# Altium PCB PCB - OSSM Wireless v0.4.pcbdoc (part 1 of 2)
Units mm, origin at the board's own origin, x right, y up, seen from the top; angles counter-clockwise.
Board outline 142.7 x 72.7 mm, 4 copper layers (Top Layer, 3v3 - all domains, GND, Bottom Layer); 90 components, 64 nets, 371 pads, 137 vias.
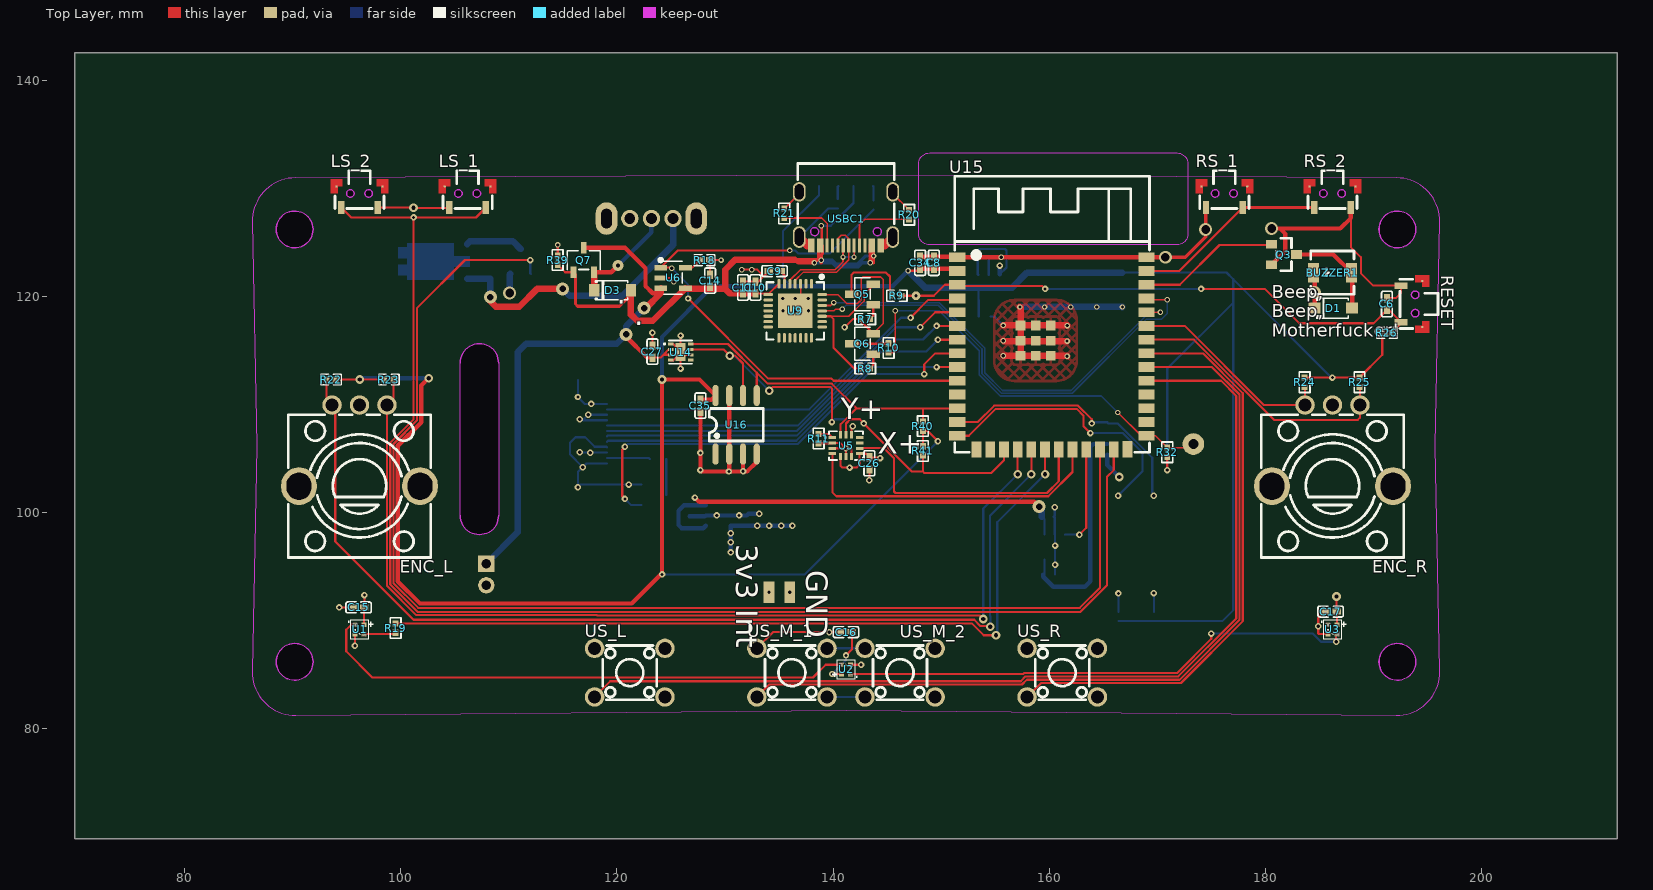
[diagram p0: Top Layer view]
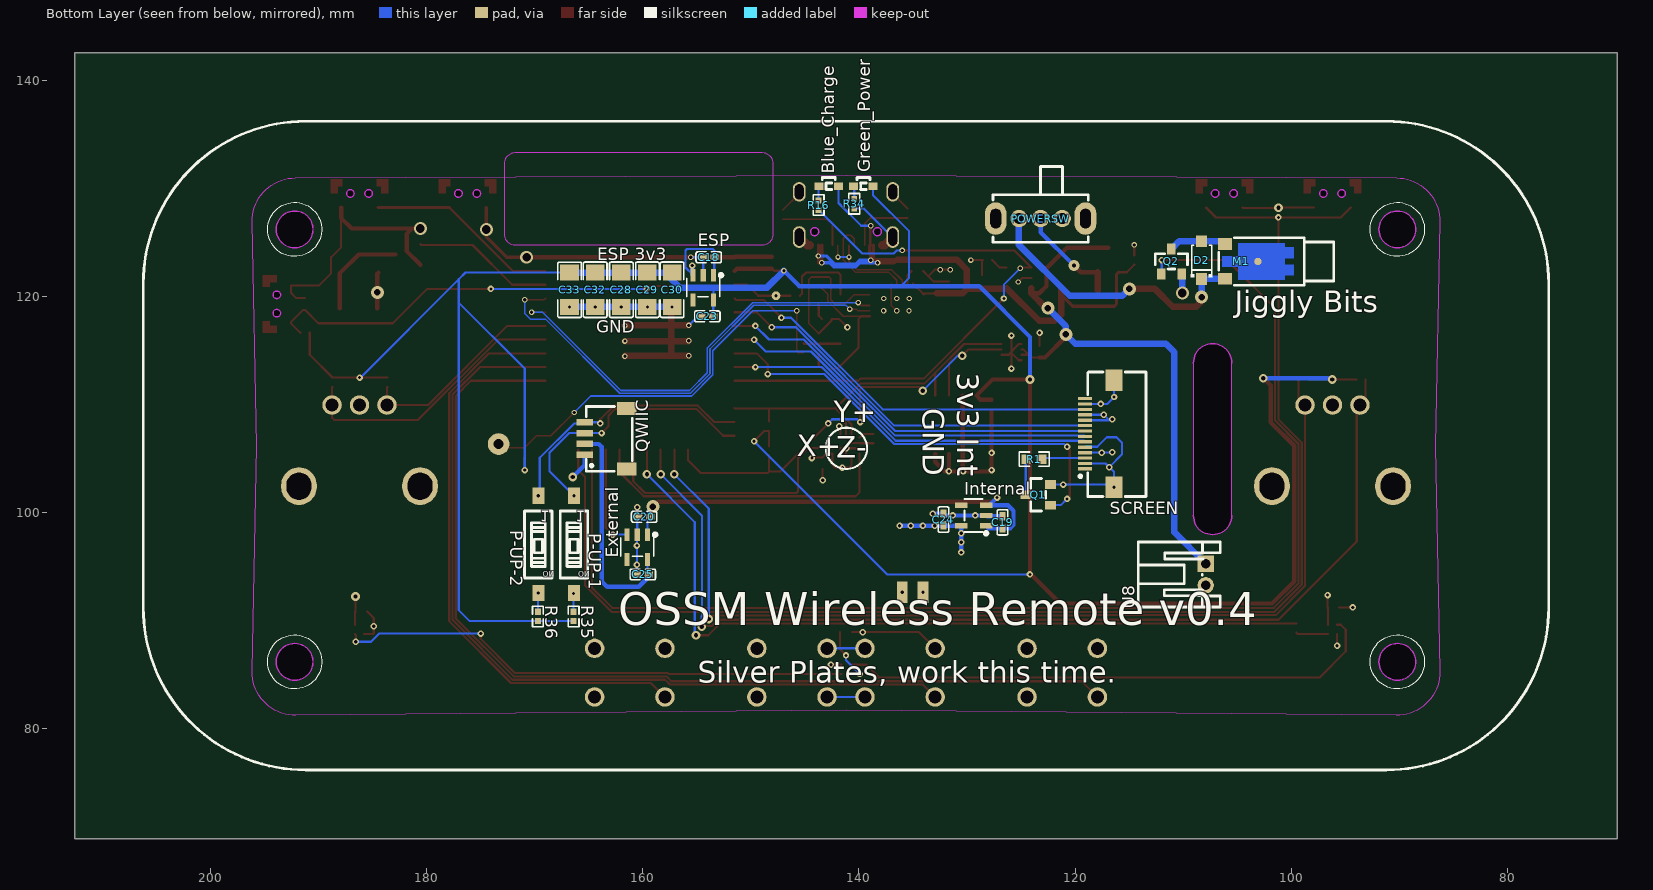
[diagram p1: Bottom Layer view, seen from below]
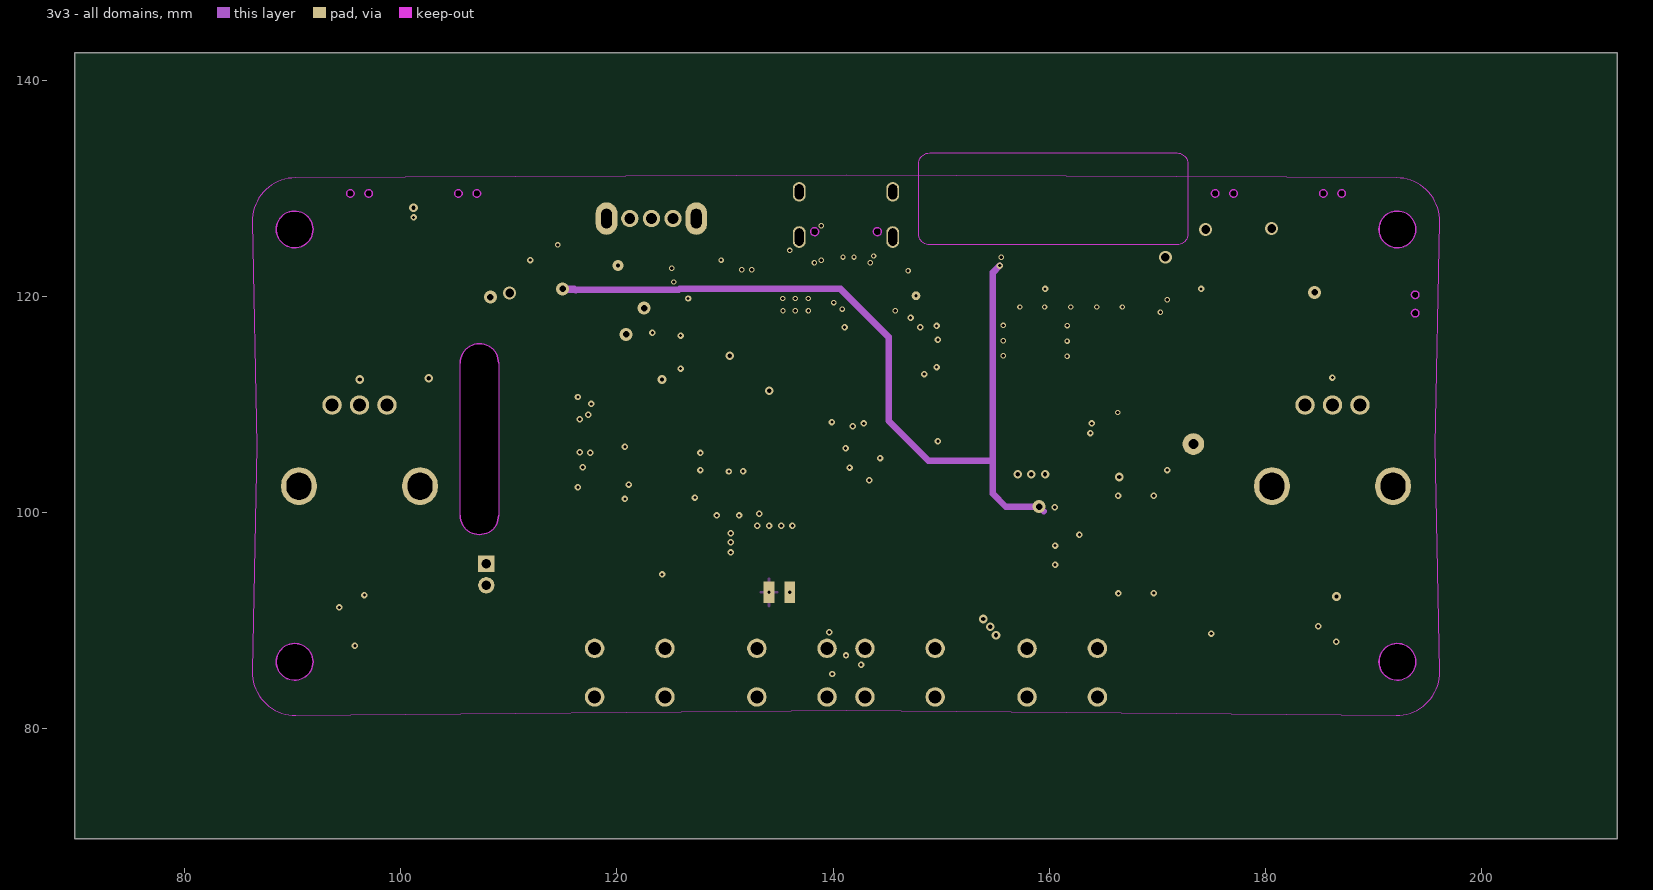
[diagram p2: 3v3 - all domains]
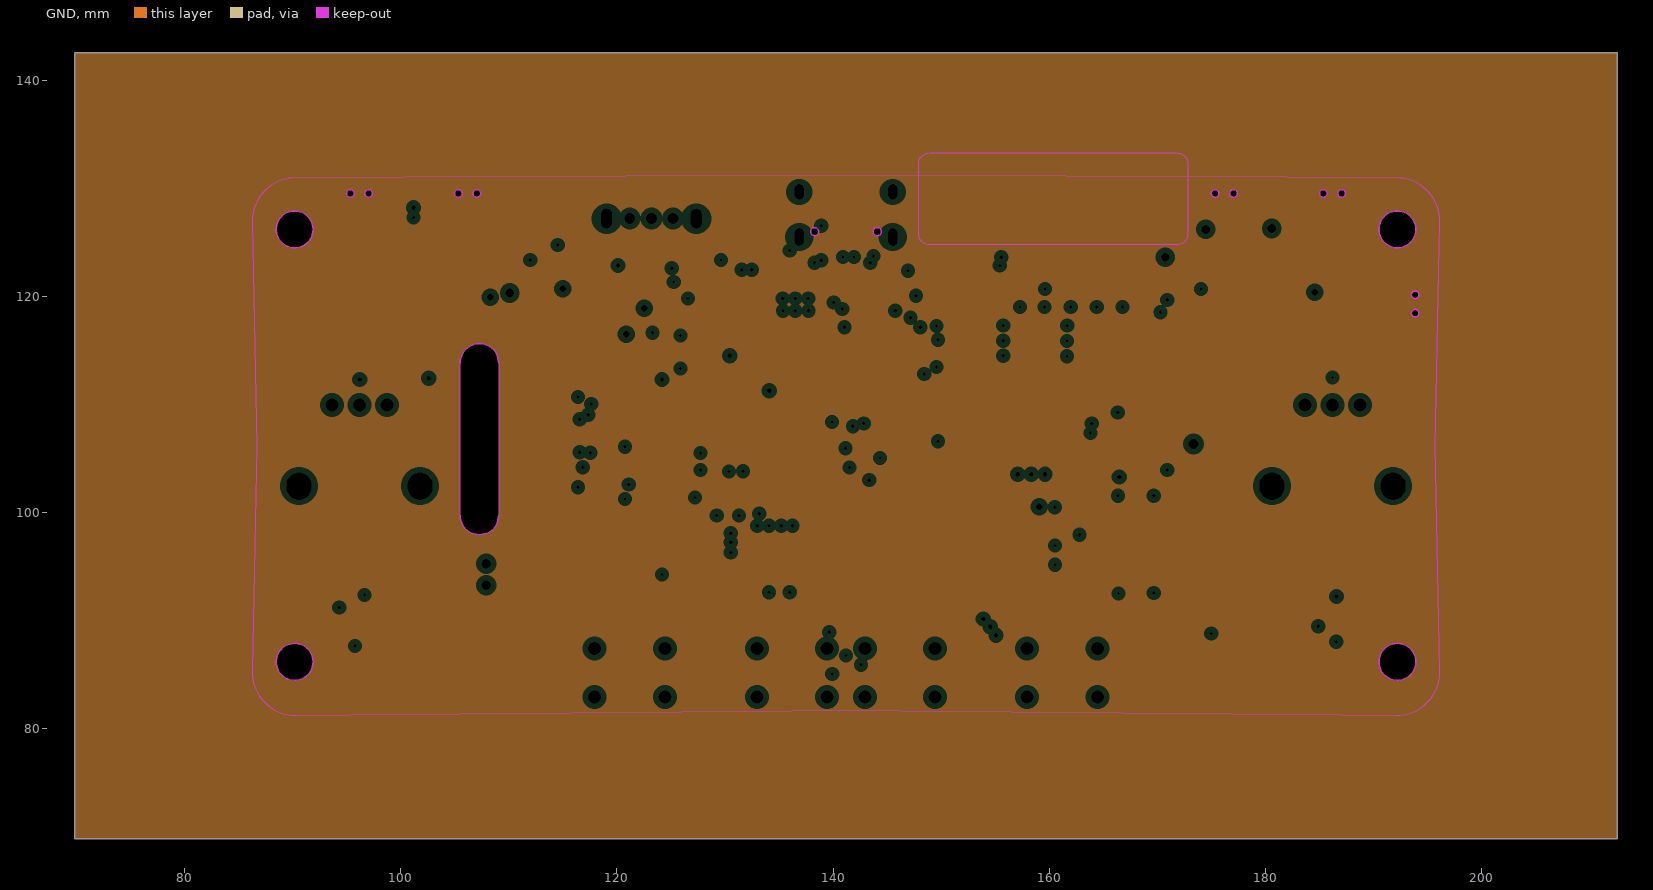
[diagram p3: GND, clearances drawn from the general rule]

## Layer stack, top to bottom
Top Layer: signal copper (thickness not stored)
Dielectric: dielectric 0.32, FR-4, Dk 4.8
3v3 - all domains: signal copper (thickness not stored)
Dielectric: dielectric 0.32, FR-4, Dk 4.8
GND: plane copper (thickness not stored)
Dielectric: dielectric 0.32, FR-4, Dk 4.8
Bottom Layer: signal copper (thickness not stored)

## Board outline
212.55,69.85 69.85,69.85 69.85,142.55 212.55,142.55
cut-out: 91.9,126.2 cw(c90.2,126.2) 88.5,126.2 cw(c90.2,126.2)
cut-out: 91.9,86.2 cw(c90.2,86.2) 88.5,86.2 cw(c90.2,86.2)
cut-out: 193.9,126.2 cw(c192.2,126.2) 190.5,126.2 cw(c192.2,126.2)
cut-out: 193.9,86.2 cw(c192.2,86.2) 190.5,86.2 cw(c192.2,86.2)
cut-out: 107.291,115.617 cw(c107.291,113.839) 109.069,113.839 109.069,99.742 cw(c107.291,99.742) 107.291,97.964 cw(c107.291,99.742) 105.513,99.742 105.513,113.839 cw(c107.291,113.839)

## Design rules (kind name [scope] priority, off if disabled: settings)
BoardOutlineClearance copperThickness1oz [All] p0: genericclearance=0.254 ignorepadtopadclearanceinfootprint=FALSE except(0: Arc-SplitContinuation Track-SplitContinuation SMDPad-SplitContinuation THPad-SplitContinuation Via-SplitContinuation Fill-SplitContinuation Poly-SplitContinuation Region-SplitContinuation Text-SplitContinuation; 0.152: Track-CutoutEdge SMDPad-CutoutEdge THPad-CutoutEdge Via-CutoutEdge Region-CutoutEdge; 0.3: Track-OutlineEdge SMDPad-OutlineEdge THPad-OutlineEdge Via-OutlineEdge Fill-OutlineEdge Region-OutlineEdge Poly-OutlineEdge Text-OutlineEdge Fill-CutoutEdge)
BoardOutlineClearance copperThickness2oz [All] p0: genericclearance=0.254 ignorepadtopadclearanceinfootprint=FALSE except(0: Arc-SplitContinuation Track-SplitContinuation SMDPad-SplitContinuation THPad-SplitContinuation Via-SplitContinuation Fill-SplitContinuation Poly-SplitContinuation Region-SplitContinuation Text-SplitContinuation; 0.152: Track-CutoutEdge SMDPad-CutoutEdge THPad-CutoutEdge Via-CutoutEdge Region-CutoutEdge; 0.3: Track-OutlineEdge SMDPad-OutlineEdge THPad-OutlineEdge Via-OutlineEdge Fill-OutlineEdge Region-OutlineEdge Poly-OutlineEdge Text-OutlineEdge Fill-CutoutEdge)
Clearance copperThickness1oz [(InNet('$1N4002') OR InNet('3V3_INTERNAL') OR InNet('3V3_ESP') OR InNet('3V3_EXTERNAL') OR InNet('GND') OR InNet('BTN_L_SHOULDER') OR InNet('$1N3724') OR InNet('BTN_R_SHOULDER') OR InNet('ESP_RXD') OR InNet('ESP_TXD') OR InNet('BTN_LEFT') OR InNet('$1N4079') OR InNet('BTN_CENTRE') OR InNet('$1N4135') OR InNet('BTN_RIGHT') OR InNet('S_CS') OR InNet('S_SCK') OR InNet('S_SDA') OR InNet('S_A0') OR InNet('S_RES') OR InNet('$1N3356') OR InNet('$1N4930') OR InNet('$1N3245') OR InNet('S_BACKLIGHT') OR InNet('VIBRATOR') OR InNet('BUZZER') OR InNet('$1N4926') OR InNet('CP_RTS') OR InNet('$1N4922') OR InNet('$1N4925') OR InNet('CP_DTR') OR InNet('$1N4921') OR InNet('ESP_EN') OR InNet('ESP_IO0') OR InNet('V_BAT_SWITCHED') OR InNet('$1N5610') OR InNet('GYRO_INT1') OR InNet('GYRO_INT2') OR InNet('SCL') OR InNet('SDA') OR InNet('V_BAT_IN') OR InNet('CHARGE_LED') OR InNet('ENC_L_A') OR InNet('ENC_L_B') OR InNet('ENC_R_A') OR InNet('ENC_R_B') OR InNet('$1N7211') OR InNet('$1N7163') OR InNet('$1N7169') OR InNet('V_USB') OR InNet('$1N6892') OR InNet('$1N7686') OR InNet('USB-') OR InNet('USB+') OR InNet('$1N7682') OR InNet('LED_PIXELS') OR InNet('EXT_1') OR InNet('EXT_2') OR InNet('$1N21887') OR InNet('3V3_EXTERNAL_CE') OR InNet('$1N42876') OR InNet('$1N42918') OR InNet('$1N54043') OR InNet('CHARGE_TO_MCU'))] p1: gap=0.178 ignorepadtopadclearanceinfootprint=FALSE except(0.102: Track-Track SMDPad-SMDPad; 0.152: Track-SMDPad Track-THPad SMDPad-THPad THPad-THPad Track-Via SMDPad-Via THPad-Via Via-Via SMDPad-Fill THPad-Fill Via-Fill Fill-Fill Track-Region SMDPad-Region THPad-Region Via-Region Region-Region Track-Poly SMDPad-Poly THPad-Poly Via-Poly Fill-Poly Region-Poly Poly-Poly Track-Text SMDPad-Text THPad-Text Via-Text Fill-Text Region-Text Poly-Text Text-Text; 0.175: Track-Hole SMDPad-Hole THPad-Hole Via-Hole Fill-Hole Region-Hole Poly-Hole Text-Hole Sheet-Hole; 0.3: Track-Fill Fill-Region Track-Sheet SMDPad-Sheet THPad-Sheet Via-Sheet Fill-Sheet Region-Sheet Poly-Sheet Text-Sheet)
Clearance copperThickness2oz [All] p1: gap=0.178 ignorepadtopadclearanceinfootprint=FALSE except(0.152: Track-SMDPad SMDPad-SMDPad Track-THPad SMDPad-THPad THPad-THPad Track-Via SMDPad-Via THPad-Via Via-Via SMDPad-Fill THPad-Fill Via-Fill Fill-Fill Track-Region SMDPad-Region THPad-Region Via-Region Region-Region Track-Poly SMDPad-Poly THPad-Poly Via-Poly Fill-Poly Region-Poly Poly-Poly Track-Text SMDPad-Text THPad-Text Via-Text Fill-Text Region-Text Poly-Text Text-Text; 0.175: Track-Hole SMDPad-Hole THPad-Hole Via-Hole Fill-Hole Region-Hole Poly-Hole Text-Hole Sheet-Hole; 0.203: Track-Track; 0.3: Track-Fill Fill-Region Track-Sheet SMDPad-Sheet THPad-Sheet Via-Sheet Fill-Sheet Region-Sheet Poly-Sheet Text-Sheet)
DiffPairsRouting differentialPair [All] p1: maxuncoupledlength=10 minlimit=5.9843 maxlimit=5.9843 mostfreqgap=5.9843 toplayer_minwidth=5 toplayer_prefwidth=10 toplayer_maxwidth=100 bottomlayer_minwidth=5 bottomlayer_prefwidth=10 bottomlayer_maxwidth=100 midlayer1_minwidth=5 midlayer1_prefwidth=10 midlayer1_maxwidth=100
PasteMaskExpansion pasteMaskExpansion [All] p1: expansion=0
PlaneConnect innerPlane [All] p1: planeconnectstyle=Relief reliefexpansion=0.508 reliefentries=4 reliefconductorwidth=0.254 reliefairgap=0.254
PolygonConnect copperRegion [All] p1: connectstyle=Relief reliefentries=4 reliefconductorwidth=10 polygonreliefangle="90 Angle" airgapwidth=10
RoutingVias viaSize [All] p1: viastyle="Through Hole" holewidth=12.0078 minholewidth=11.811 maxholewidth=248.0314 width=24.0158 minwidth=19.685 maxwidth=393.7008
SolderMaskExpansion solderMaskExpansion [All] p1: useseparateexpansions=TRUE expansion=2.0079 expansionbottom=2.0079
Width copperThickness1oz [All] p1: maxlimit=100 minlimit=4 preferedwidth=10
Width copperThickness2oz [All] p1: maxlimit=100 minlimit=8 preferedwidth=10

## Components (designator, comment, footprint, x,y, rotation, side; value= is the part's Value field where it differs from the comment)
Blue_Charge "TJ-S1706SW6TGLC6B-A5" LED-SMD_L1.7-W0.6-RD 142.8,130.2 r180 bottom
BUZZER1 "FUET-4020" BUZ-SMD_L4.0-W4.0-P3.50-L 186.2,122.2 r0 top locked
C6 "GRM155R61A106ME44D" C0402 191.238,119.3 r90 top
C8 "GRM155R61A106ME44D" C0402 149.328,123.11 r270 top
C9 "CL05A104KA5NNNC" C0402 134.596,122.348 r0 top
C10 "CL05A105KA5NQNC" C0402 132.818,120.824 r270 top
C11 "CL05A104KA5NNNC" C0402 131.675,120.824 r270 top
C14 "CL05A106MP5NUNC_C315248" C0402 128.627,121.459 r270 top
C15 "CL05A104KA5NNNC" C0402 96.115,91.233 r180 top
C16 "CL05A104KA5NNNC" C0402 141.2,88.947 r180 top
C17 "CL05A104KA5NNNC" C0402 186.031,90.852 r180 top
C18 "CL05A225KO5NQNC" C0402 153.9,123.618 r0 bottom
C19 "CL05A225KO5NQNC" C0402 126.722,99.107 r90 bottom
C20 "CL05A225KO5NQNC" C0402 159.869,99.615 r0 bottom
C23 "GRM155R61A106ME44D" C0402 154.027,118.157 r180 bottom
C24 "GRM155R61A106ME44D" C0402 132.183,99.361 r270 bottom
C25 "GRM155R61A106ME44D" C0402 159.996,94.281 r180 bottom
C26 "GRM155R61A106ME44D" C0402 143.359,104.568 r90 top
C27 "CL05A105KA5NQNC" C0402 123.298,114.892 r270 top
C28 "GRM31CR60J107ME39L" C1206 161.984,120.615 r90 bottom
C29 "GRM31CR60J107ME39L" C1206 159.571,120.615 r90 bottom
C30 "GRM31CR60J107ME39L" C1206 157.285,120.615 r90 bottom
C32 "GRM31CR60J107ME39L" C1206 164.397,120.615 r90 bottom
C33 "GRM31CR60J107ME39L" C1206 166.77,120.612 r90 bottom
C34 "CC0402KRX7R5BB103" C0402 148.058,123.11 r270 top
C35 "GRM155R61A106ME44D" C0402 127.738,109.902 r90 top
D1 "B5819W_C2943878" SOD-123F_L2.7-W1.6-LS3.8-RD-1 186.285,118.919 r0 top
D2 "B5819W_C2943878" SOD-123F_L2.7-W1.6-LS3.8-RD-1 108.307,123.364 r90 bottom
D3 "B5819W-TP" SOD-123_L2.8-W1.8-LS3.7-RD 119.61,120.57 r0 top
ENC_L "EC12E24204A7" SW-TH_EC12EXXXX 96.2,106.2 r180 top locked
ENC_R "EC12E24204A7" SW-TH_EC12EXXXX 186.2,106.2 r180 top locked
ESP "ME6211C33M5G-N" SOT-23-5_L3.0-W1.7-P0.95-LS2.8-BL 154.408,120.824 r0 bottom
External "ME6211C33M5G-N" SOT-23-5_L3.0-W1.7-P0.95-LS2.8-BL 160.504,96.821 r0 bottom
Green_Power "TJ-S1706SW6TGLC2G-A5" LED-SMD_L1.7-W0.6-RD 139.6,130.2 r180 bottom
Internal "ME6211C33M5G-N" SOT-23-5_L3.0-W1.7-P0.95-LS2.8-BL 129.389,99.742 r90 bottom
LS_1 "TS24CA" SW-SMD_TS24CA#1 106.2,129.2 r0 top locked
LS_2 "TS24CA" SW-SMD_TS24CA#1 96.2,129.2 r0 top locked
M1 "Z3OC1T8219731" VIBRATING-MOTOR-SMD_3P-C9900001680 104.624,123.237 r0 bottom
P-UP-1 "2.54-1P TPGT" SW-SMD_2P-L6.2-W2.5-LS9.4 166.365,97.059 r270 bottom
P-UP-2 "2.54-1P TPGT" SW-SMD_2P-L6.2-W2.5-LS9.4 169.659,97.059 r270 bottom
POWERSW "SK12D07VG5" SW-TH_SK12D07VG5 123.2,127.2 r0 bottom
Q1 "AO3400_C2938367" SOT-23_L2.9-W1.3-P1.90-LS2.4-BR 123.42,101.647 r180 bottom
Q2 "AO3400_C2938367" SOT-23_L2.9-W1.3-P1.90-LS2.4-BR 111.101,123.237 r270 bottom
Q3 "AO3400_C2938367" SOT-23_L2.9-W1.3-P1.90-LS2.4-BR 181.713,123.872 r180 top
Q5 "BC817" SOT-23-3_L2.9-W1.3-P1.90-LS2.4-BR 142.724,120.189 r0 top
Q6 "BC817" SOT-23-3_L2.9-W1.3-P1.90-LS2.4-BR 142.724,115.617 r0 top
Q7 "SI2301_C727151" SOT-23-3_L2.9-W1.4-P1.91-LS2.6-BR 116.943,123.364 r270 top
QWIIC "SM04B-SRSS-TB(LF)(SN)" CONN-SMD_4P-P1.00_SM04B-SRSS-TB-LF-SN 163.425,106.854 r90 bottom
R1 "PS03W4F100JT5E" R0603 123.801,104.949 r180 bottom
R7 "WR04X1002FTL" R0402 142.978,117.903 r0 top
R8 "WR04X1002FTL" R0402 142.978,113.331 r0 top
R9 "RC0402FR-07100RL" R0402 145.899,120.062 r0 top
R10 "RC0402FR-07100RL" R0402 145.137,115.236 r270 top
R11 "RC0402FR-071KL" R0402 138.66,106.854 r90 top
R16 "RC0402FR-071KL" R0402 143.74,128.444 r270 bottom
R18 "RC0402FR-072KL" R0402 128.119,123.364 r0 top
R19 "RC0402FR-07330RL" R0402 99.544,89.328 r270 top
R20 "0402WGF5101TCE" R0402 147.042,127.555 r90 top
R21 "0402WGF5101TCE" R0402 135.485,127.682 r90 top
R22 "RC0402FR-0710KL" R0402 93.575,112.315 r180 top
R23 "RC0402FR-0710KL" R0402 98.909,112.315 r0 top
R24 "RC0402FR-0710KL" R0402 183.618,112.061 r270 top
R25 "RC0402FR-0710KL" R0402 188.698,112.061 r270 top
R26 "WR04X1002FTL" R0402 191.238,116.633 r180 top
R32 "RC0402FR-0710KL" R0402 170.918,105.584 r270 top
R34 "RC0402FR-075K1L" R0402 140.438,128.571 r90 bottom
R35 "RC0402FR-0710KL" R0402 166.398,90.396 r270 bottom
R36 "RC0402FR-0710KL" R0402 169.7,90.396 r270 bottom
R39 "RC0402FR-0710KL" R0402 114.53,123.364 r90 top
R40 "0402WGJ0472TCE" R0402 148.312,107.997 r90 top
R41 "0402WGJ0472TCE" R0402 148.312,105.711 r270 top
RESET "TS24CA" SW-SMD_TS24CA#2 193.524,119.3 r270 top locked
RS_1 "TS24CA" SW-SMD_TS24CA#1 176.2,129.2 r0 top locked
RS_2 "TS24CA" SW-SMD_TS24CA#1 186.2,129.2 r0 top locked
SCREEN "AFC01-S14FCA-00" FPC-SMD_AFC01-S14FCA-00 117.742,107.3 r90 bottom
U1 "XL-1010RGBC-WS2812B" LED-SMD_4P-L1.0-W1.0-TL_XL-1010RGBC-WS2812B 96.2,89.2 r0 top locked
U2 "XL-1010RGBC-WS2812B" LED-SMD_4P-L1.0-W1.0-TL_XL-1010RGBC-WS2812B 141.2,85.5 r180 top locked
U3 "XL-1010RGBC-WS2812B" LED-SMD_4P-L1.0-W1.0-TL_XL-1010RGBC-WS2812B 186.2,89.2 r0 top locked
U5 "LSM6DS3TR-C" LGA-14_L3.0-W2.5-P0.50-TL 141.2,106.2 r0 top
U6 "TP4054-42-SOT25R" SOT-23-5_L3.0-W1.7-P0.95-LS2.8-BL 125.198,121.713 r270 top
U8 "S2B-PH-K(LF)(SN)" CONN-TH_S2B-PH-K-LF-SN 107.926,94.281 r90 bottom
U9 "CP2102-GMR" WQFN-28_L5.0-W5.0-P0.50-BL-EP3.2 136.501,118.665 r180 top
U14 "MAX17048G+T10" DFN-8_L2.0-W2.0-P0.50-BL-EP 125.9,114.853 r270 top
U15 "ESP32-S3-WROOM-1-N16R8" WIRELM-SMD_ESP32-S3-WROOM-1 160.25,114.728 r0 top locked
U16 "AT24C04C-SSHM-T" SOIC-8_L5.0-W4.0-P1.27-LS6.0-BL 131.04,108.124 r0 top
US_L "TC-6610-9-260G" SW-TH_4P-L5.0-W5.0-P4.50-LS6.5 121.2,85.2 r0 top locked
US_M_1 "TC-6610-9-260G" SW-TH_4P-L5.0-W5.0-P4.50-LS6.5 136.2,85.2 r0 top locked
US_M_2 "TC-6610-9-260G" SW-TH_4P-L5.0-W5.0-P4.50-LS6.5 146.2,85.2 r0 top locked
US_R "TC-6610-9-260G" SW-TH_4P-L5.0-W5.0-P4.50-LS6.5 161.2,85.2 r0 top locked
USBC1 "TYPE-C-31-M-12" USB-C_SMD-TYPE-C-31-M-12 141.2,127.2 r180 top locked

## Footprints (in the part's own frame and the unit in brackets; to place one, negate y for a bottom-side part, rotate by r counter-clockwise, add the part's x,y. Pads: shape width x height; smd on the part's side, far side on the other; paste and mask are expansions set on the pad)
BUZ-SMD_L4.0-W4.0-P3.50-L [mm]
  rect 1x1.8 smd: 1(-1.75,0) 2(1.75,0)
  silkscreen extent -2,-2 2,2
C0402 [mm]
  rect 0.79x0.54 smd: 1(-0.545,0) 2(0.545,0)
  silkscreen extent -1.17,-0.5 1.17,0.5
C1206 [mm]
  rect 1.485x1.728 smd: 1(-1.593,0) 2(1.593,0)
  silkscreen extent -2.56,-1.09 2.56,1.09
CONN-SMD_4P-P1.00_SM04B-SRSS-TB-LF-SN [mm]
  rect 0.6x1.55 smd: 1(-1.5,1.938) 2(-0.5,1.938) 3(0.5,1.938) 4(1.5,1.938)
  rect 1.2x1.8 smd: 5(2.8,-1.938) 6(-2.8,-1.938)
  silkscreen extent -3.02,-2.46 2.96,1.8
CONN-TH_S2B-PH-K-LF-SN [mm]
  rect 1.5x1.5 hole 0.9: 1(1,0)
  round 1.5 hole 0.9: 2(-1,0)
  silkscreen extent -3.01,-1.35 3,6.25
DFN-8_L2.0-W2.0-P0.50-BL-EP [mm]
  rect 0.28x0.505 smd: 1(-0.75,-0.928) 2(-0.25,-0.928) 3(0.25,-0.928) 4(0.75,-0.928) 5(0.75,0.928) 6(0.25,0.928) 7(-0.25,0.928) 8(-0.75,0.928)
  rect 1.65x0.9 smd: 9(0,0)
  silkscreen extent -1.08,-1.55 1.08,1.08
FPC-SMD_AFC01-S14FCA-00 [mm]
  rect 0.3x1.3 smd: 1(-3.25,1.34) 2(-2.75,1.339) 3(-2.25,1.34) 4(-1.75,1.34) 5(-1.25,1.34) 6(-0.75,1.34) 7(-0.25,1.34) 8(0.25,1.34) 9(0.75,1.34) 10(1.25,1.34) 11(1.75,1.34) 12(2.25,1.34) 13(2.75,1.34) 14(3.25,1.34)
  rect 2x1.6 smd: 15(4.948,-1.34) 16(-4.948,-1.34)
  silkscreen extent -5.8,-4.3 5.7,1.91
LED-SMD_4P-L1.0-W1.0-TL_XL-1010RGBC-WS2812B [mm]
  rect 0.45x0.45 smd: 1(-0.425,0.425) 2(0.425,0.425) 3(-0.425,-0.425) 4(0.425,-0.425)
  silkscreen extent -1.05,-0.85 1.27,0.85
LED-SMD_L1.7-W0.6-RD [mm]
  rect 0.8x0.7 smd: 1(-0.9,0) 2(0.9,0)
  silkscreen extent -0.59,-0.32 0.61,0.8
LGA-14_L3.0-W2.5-P0.50-TL [mm]
  rect 0.675x0.28 smd: 1(-1.262,0.75) 2(-1.262,0.25) 3(-1.262,-0.25) 4(-1.262,-0.75) 8(1.262,-0.75) 9(1.262,-0.25) 10(1.262,0.25) 11(1.262,0.75)
  rect 0.28x0.675 smd: 5(-0.5,-1.012) 6(0,-1.012) 7(0.5,-1.012) 12(0.5,1.012) 13(0,1.012) 14(-0.5,1.012)
  silkscreen extent -1.98,-1.33 1.58,1.33
R0402 [mm]
  rect 0.566x0.54 smd: 1(-0.433,0) 2(0.433,0)
  silkscreen extent -0.94,-0.5 0.94,0.5
R0603 [mm]
  rect 0.806x0.864 smd: 1(-0.753,0) 2(0.753,0)
  silkscreen extent -1.39,-0.66 1.39,0.66
SOD-123_L2.8-W1.8-LS3.7-RD [mm]
  rect 0.95x1.15 smd: 1(-1.692,0) 2(1.692,0)
  silkscreen extent -1.58,-0.87 1.41,0.87
SOD-123F_L2.7-W1.6-LS3.8-RD-1 [mm]
  rect 1.1x1 smd: 1(-1.735,0) 2(1.735,0)
  silkscreen extent -1.6,-1 1.38,1
SOIC-8_L5.0-W4.0-P1.27-LS6.0-BL [mil]
  oval 22.38x76.78 smd: 1(-75,-106.5) 2(-25,-106.5) 3(25,-106.5) 4(75,-106.5) 5(75,106.5) 6(25,106.5) 7(-25,106.5) 8(-75,106.5)
  silkscreen extent -98,-59 98,59
SOT-23-3_L2.9-W1.3-P1.90-LS2.4-BR [mm]
  rect 1.25x0.7 smd: 1(1,-0.95) 2(1,0.95) 3(-1,0)
  silkscreen extent -0.73,-1.53 0.73,1.53
SOT-23-3_L2.9-W1.4-P1.91-LS2.6-BR [mm]
  rect 1.07x0.532 smd: 1(1.135,-0.955) 2(1.135,0.955) 3(-1.135,0)
  silkscreen extent -0.88,-1.54 0.88,1.54
SOT-23-5_L3.0-W1.7-P0.95-LS2.8-BL [mm]
  rect 0.49x1.157 smd: 1(-0.95,-1.154) 2(0,-1.154) 3(0.95,-1.154)
  rect 0.49x1.175 smd: 4(0.95,1.154) 5(-0.95,1.154)
  silkscreen extent -1.8,-1.29 1.53,0.85
SOT-23_L2.9-W1.3-P1.90-LS2.4-BR [mm]
  rect 1x0.8 smd: 1(1.15,-0.95) 2(1.15,0.95) 3(-1.15,0)
  silkscreen extent -0.7,-1.5 0.7,1.5
SW-SMD_2P-L6.2-W2.5-LS9.4 [mm]
  rect 1.5x1.1 smd: 1(-4.5,0) 2(4.5,0)
  silkscreen extent -3.1,-1.27 3.1,1.27
SW-SMD_TS24CA#1 [mm]
  round 0.21 smd: 1(-2.125,0.975) 2(2.125,0.975)
  rect 0.6x1.2 smd: 3(-1.7,-0.975) 4(1.7,-0.975)
  Top Layer region: 2.65,0.325 2.65,1.625 1.6,1.625 1.6,0.975 1.6,0.975 2,0.975 2,0.325
  Top Layer region: -1.6,0.975 -1.6,1.625 -2.65,1.625 -2.65,0.325 -2,0.325 -2,0.975 -1.6,0.975
  Board Outline Layer circle w0.005: c-0.85,0.325 r0.35
  Board Outline Layer circle w0.005: c0.85,0.325 r0.35
  Board Outline Layer region: -0.5,0.325 -0.535,0.173 -0.632,0.051 -0.772,-0.016 -0.928,-0.016 -1.068,0.051 -1.165,0.173 -1.2,0.325 -1.2,0.325 -1.165,0.477 -1.068,0.599 -0.928,0.666 -0.772,0.666 -0.632,0.599 -0.535,0.477 -0.5,0.325
  Board Outline Layer region: 1.2,0.325 1.165,0.173 1.068,0.051 0.928,-0.016 0.772,-0.016 0.632,0.051 0.535,0.173 0.5,0.325 0.5,0.325 0.535,0.477 0.632,0.599 0.772,0.666 0.928,0.666 1.068,0.599 1.165,0.477 1.2,0.325
  Multi-Layer board cut-out: -0.5,0.325 -0.535,0.173 -0.632,0.051 -0.772,-0.016 -0.928,-0.016 -1.068,0.051 -1.165,0.173 -1.2,0.325 -1.2,0.325 -1.165,0.477 -1.068,0.599 -0.928,0.666 -0.772,0.666 -0.632,0.599 -0.535,0.477 -0.5,0.325
  Multi-Layer board cut-out: 1.2,0.325 1.165,0.173 1.068,0.051 0.928,-0.016 0.772,-0.016 0.632,0.051 0.535,0.173 0.5,0.325 0.5,0.325 0.535,0.477 0.632,0.599 0.772,0.666 0.928,0.666 1.068,0.599 1.165,0.477 1.2,0.325
  silkscreen extent -2.28,-1.07 2.28,2.43
SW-SMD_TS24CA#2 [mm]
  round 0.21 smd: 1(-2.125,0.975) 2(2.125,0.975)
  rect 0.6x1.2 smd: 3(-1.7,-0.975) 4(1.7,-0.975)
  Top Layer region: 2.65,0.325 2.65,1.625 1.6,1.625 1.6,0.975 1.6,0.975 2,0.975 2,0.325
  Top Layer region: -1.6,0.975 -1.6,1.625 -2.65,1.625 -2.65,0.325 -2,0.325 -2,0.975 -1.6,0.975
  Board Outline Layer circle w0.005: c-0.85,0.325 r0.35
  Board Outline Layer circle w0.005: c0.85,0.325 r0.35
  Board Outline Layer region: -0.85,0.675 -0.698,0.64 -0.576,0.543 -0.509,0.403 -0.509,0.247 -0.576,0.107 -0.698,0.01 -0.85,-0.025 -0.85,-0.025 -1.002,0.01 -1.124,0.107 -1.191,0.247 -1.191,0.403 -1.124,0.543 -1.002,0.64 -0.85,0.675
  Board Outline Layer region: 0.85,0.675 1.002,0.64 1.124,0.543 1.191,0.403 1.191,0.247 1.124,0.107 1.002,0.01 0.85,-0.025 0.85,-0.025 0.698,0.01 0.576,0.107 0.509,0.247 0.509,0.403 0.576,0.543 0.698,0.64 0.85,0.675
  Multi-Layer board cut-out: -0.85,0.675 -0.698,0.64 -0.576,0.543 -0.509,0.403 -0.509,0.247 -0.576,0.107 -0.698,0.01 -0.85,-0.025 -0.85,-0.025 -1.002,0.01 -1.124,0.107 -1.191,0.247 -1.191,0.403 -1.124,0.543 -1.002,0.64 -0.85,0.675
  Multi-Layer board cut-out: 0.85,0.675 1.002,0.64 1.124,0.543 1.191,0.403 1.191,0.247 1.124,0.107 1.002,0.01 0.85,-0.025 0.85,-0.025 0.698,0.01 0.576,0.107 0.509,0.247 0.509,0.403 0.576,0.543 0.698,0.64 0.85,0.675
  silkscreen extent -2.28,-1.07 2.28,2.43
SW-TH_4P-L5.0-W5.0-P4.50-LS6.5 [mm]
  round 1.8 hole 1.2: 1(-3.25,2.25) 2(3.25,2.25) 3(-3.25,-2.25) 4(3.25,-2.25)
  silkscreen extent -2.5,-2.5 2.5,2.5
SW-TH_EC12EXXXX [mm]
  round 1.8 hole 1.2: A(-2.54,-3.75) B(2.54,-3.75) C(0,-3.75)
  oval 3.3x3.5 hole 2.3 slot 2.5 at 90 deg: D(5.6,3.75) E(-5.6,3.75)
  silkscreen extent -6.6,-2.85 6.6,10.35
SW-TH_SK12D07VG5 [mm]
  round 1.6 hole 1: 1(-2,0) 2(0,0) 3(2,0)
  oval 2x3 hole 1 slot 1.8 at 90 deg: 4(4.15,0) 5(-4.15,0)
  silkscreen extent -4.4,-4.83 4.4,2.2
USB-C_SMD-TYPE-C-31-M-12 [mm]
  oval 1.2x2 hole 0.8 slot 1.6 at 90 deg: 0(-4.325,1.706) 1(4.325,1.706)
  oval 1.2x1.8 hole 0.8 slot 1.4 at 90 deg: 2(4.325,-2.474) 3(-4.325,-2.474)
  rect 0.3x1.3 smd: A1(-3.35,2.474) A4(-2.55,2.474) A5(-1.25,2.474) A6(-0.25,2.474) A7(0.25,2.474) A8(1.25,2.474) A9(2.55,2.474) A12(3.35,2.474) B1(3.05,2.474) B4(2.25,2.474) B5(1.75,2.474) B6(0.75,2.474) B7(-0.75,2.474) B8(-1.75,2.474) B9(-2.25,2.474) B12(-3.05,2.474)
  Board Outline Layer circle w0.005: c-2.9,1.206 r0.375
  Board Outline Layer circle w0.005: c2.9,1.206 r0.375
  Board Outline Layer region: -3.275,1.206 -3.238,1.368 -3.134,1.499 -2.983,1.571 -2.816,1.571 -2.666,1.499 -2.562,1.368 -2.525,1.206 -2.525,1.206 -2.562,1.043 -2.666,0.912 -2.816,0.84 -2.983,0.84 -3.134,0.912 -3.238,1.043 -3.275,1.206
  Board Outline Layer region: 2.525,1.206 2.562,1.368 2.666,1.499 2.816,1.571 2.983,1.571 3.134,1.499 3.238,1.368 3.275,1.206 3.275,1.206 3.238,1.043 3.134,0.912 2.983,0.84 2.816,0.84 2.666,0.912 2.562,1.043 2.525,1.206
  Multi-Layer board cut-out: -3.275,1.206 -3.238,1.368 -3.134,1.499 -2.983,1.571 -2.816,1.571 -2.666,1.499 -2.562,1.368 -2.525,1.206 -2.525,1.206 -2.562,1.043 -2.666,0.912 -2.816,0.84 -2.983,0.84 -3.134,0.912 -3.238,1.043 -3.275,1.206
  Multi-Layer board cut-out: 2.525,1.206 2.562,1.368 2.666,1.499 2.816,1.571 2.983,1.571 3.134,1.499 3.238,1.368 3.275,1.206 3.275,1.206 3.238,1.043 3.134,0.912 2.983,0.84 2.816,0.84 2.666,0.912 2.562,1.043 2.525,1.206
  silkscreen extent -4.47,-5.09 4.47,0.49
VIBRATING-MOTOR-SMD_3P-C9900001680 [mm]
  rect 1.3x1.1 smd: 1(1.525,1.6) 2(1.525,-1.6)
  round 0.68 smd: 3(-1.525,0)
  Top Layer region: -4.025,1.7 0.275,1.7 0.275,0.5 1.775,0.5 1.775,-0.5 0.275,-0.5 0.275,-1.7 -4.025,-1.7 -4.025,-1.3 -4.825,-1.3 -4.825,-0.3 -4.025,-0.3 -4.025,0.3 -4.825,0.3 -4.825,1.3 -4.025,1.3
  silkscreen extent -8.55,-2.2 2.1,2.2
WIRELM-SMD_ESP32-S3-WROOM-1 [mm]
  rect 1.5x0.9 smd: 1(-8.75,8.895) 2(-8.75,7.625) 3(-8.75,6.355) 4(-8.75,5.085) 5(-8.75,3.815) 6(-8.75,2.545) 7(-8.75,1.275) 8(-8.75,0.005) 9(-8.75,-1.265) 10(-8.75,-2.535) 11(-8.75,-3.805) 12(-8.75,-5.075) 13(-8.75,-6.345) 14(-8.75,-7.615) 27(8.75,-7.615) 28(8.75,-6.345) 29(8.75,-5.075) 30(8.75,-3.805) 31(8.75,-2.535) 32(8.75,-1.265) 33(8.75,0.005) 34(8.75,1.275) 35(8.75,2.545) 36(8.75,3.815) 37(8.75,5.085) 38(8.75,6.355) 39(8.75,7.625) 40(8.75,8.895)
  rect 0.9x1.5 smd: 15(-6.985,-8.895) 16(-5.715,-8.895) 17(-4.445,-8.895) 18(-3.175,-8.895) 19(-1.905,-8.895) 20(-0.635,-8.895) 21(0.635,-8.895) 22(1.905,-8.895) 23(3.175,-8.895) 24(4.445,-8.895) 25(5.715,-8.895) 26(6.985,-8.865)
  rect 0.9x0.9 smd: 41(-2.9,-0.225) 41(-2.9,1.175) 41(-2.9,2.575) 41(-1.5,-0.225) 41(-1.5,1.175) 41(-1.5,2.575) 41(-0.1,-0.225) 41(-0.1,1.175) 41(-0.1,2.575)
  silkscreen extent -9,-9.14 9.02,16.39
WQFN-28_L5.0-W5.0-P0.50-BL-EP3.2 [mm]
  oval 0.28x0.9 smd: 1(-1.501,-2.5) 2(-1.001,-2.5) 3(-0.501,-2.5) 4(0,-2.5) 5(0.5,-2.5) 6(1.001,-2.5) 7(1.501,-2.5) 15(1.501,2.5) 16(1.001,2.5) 17(0.5,2.5) 18(0,2.5) 19(-0.501,2.5) 20(-1.001,2.5) 21(-1.501,2.5)
  oval 0.9x0.28 smd: 8(2.5,-1.501) 9(2.5,-1.001) 10(2.5,-0.501) 11(2.5,0) 12(2.5,0.5) 13(2.5,1.001) 14(2.5,1.501) 22(-2.5,1.501) 23(-2.5,1.001) 24(-2.5,0.5) 25(-2.5,0) 26(-2.5,-0.501) 27(-2.5,-1.001) 28(-2.5,-1.501)
  rect 3.2x3.2 smd: 29(0,0)
  silkscreen extent -2.65,-3.3 2.65,2.65

## Free pads (board coordinates)
  rect 1x2 hole 0.3: 1(134.088,92.63) 1(135.993,92.63)
  round 0.8 hole 0.3: 1(147.677,120.062)
  round 2 hole 0.914: 1(173.331,106.346)

## Via types
v1: diameter 0.6, hole 0.3, Top Layer to Bottom Layer, 73 vias
v2: diameter 0.5, hole 0.3, Top Layer to Bottom Layer, 39 vias
v3: diameter 0.8, hole 0.4, Top Layer to Bottom Layer, 14 vias
v4: diameter 1.2, hole 0.6, Top Layer to Bottom Layer, 6 vias
v5: diameter 1.2, hole 0.8, Top Layer to Bottom Layer, 4 vias
v6: diameter 1, hole 0.4, Top Layer to Bottom Layer, 1 vias

## Nets (pads, with @x,y where several pads share a name; then routed paths per layer and width w, separated by ;. In a path a pad name is that pad's centre, name@x,y a point inside that pad or via, vN(x,y) a via of type N, cw(c..) or ccw(c..) an arc to the next point about the centre after c; other vN are vias at no path point)
3V3_ESP: C8.2 C23.2 C28.2 C29.2 C30.2 C32.2 C33.2 C34.2 C35.2 ESP.5 Green_Power.2 R22.1 R23.1 R24.1 R25.1 R26.2 R32.2 R35.2 R36.2 R40.1 R41.1 U15.2 U16.8 | length 281.6
  Top Layer w0.2: R22.1@94.008,112.315 v3(96.232,112.315) R23.1@98.476,112.315 ; v2(146.944,122.377) 147.87,122.377 C34.2@148.058,122.565 ; R41.1@148.312,106.144 R40.1@148.312,107.564 148.745,107.564 v1(149.709,106.6) ; v1(170.918,103.933) R32.2@170.918,105.151 ; R24.1@183.618,112.494 v1(186.19,112.494) R25.1@188.698,112.494 190.805,114.601 R26.2@190.805,116.633
  Top Layer w0.4: v3(102.592,112.442) 101.909,111.759 101.909,108.351 99.746,106.187 99.746,93.643 101.794,91.595 121.388,91.595 124.182,94.389 v3(124.182,112.315) 127.649,112.315 U16.8@129.135,110.829 128.753,110.447 C35.2@127.738,110.447 ; C34.2@148.058,122.565 C8.2@149.328,122.565 151.288,122.565 U15.2@151.5,122.353
  Bottom Layer w0.2: v1(124.182,94.281) 137.39,94.281 v1(149.709,106.6) ; 136.12,120.951 135.358,121.713 135.358,126.031 138.7,129.373 Green_Power.2@138.7,130.2 ; 153.473,120.824 153.458,120.809 ESP.5@153.458,119.67 153.482,119.646 C23.2@153.482,118.157 ; C32.2@164.397,122.208 176.392,122.208 177.014,121.586 ; R35.2@166.398,89.963 R36.2@169.7,89.963 175.998,89.963 177.014,90.979 177.014,119.424 ; v1(170.918,103.933) 170.918,113.328 177.014,119.424 ; v1@186.158,112.442 177.014,121.586 ; 177.014,119.424 177.014,121.586
  Bottom Layer w0.4: v3(96.232,112.315) 96.359,112.442 v3(102.592,112.442) ; v3(124.182,112.315) 124.182,116.252 128.881,120.951 136.12,120.951 145.518,120.951 v2(146.944,122.377)
  Bottom Layer w0.6: v2(146.944,122.377) 148.497,120.824 153.473,120.824 156.567,120.824 157.948,122.205 C33.2@166.77,122.205
3V3_EXTERNAL: C25.2 External.5 QWIIC.2 | length 20.7
  Bottom Layer w0.2: C25.2@159.451,94.281 159.554,94.384 External.5@159.554,95.667
  Bottom Layer w0.4: C25.2@159.451,94.281 159.451,94.064 160.377,93.138 163.298,93.138 163.806,93.646 163.806,106.092 164.068,106.354 QWIIC.2@165.363,106.354
3V3_EXTERNAL_CE: External.3 U15.23 | length 9.5
  Top Layer w0.2: v1(162.79,97.964) 163.425,98.599 U15.23@163.425,105.833
  Bottom Layer w0.2: External.3@161.454,97.975 161.465,97.964 v1(162.79,97.964)
3V3_INTERNAL: BUZZER1.1 C15.1 C16.1 C17.1 C24.2 C26.2 D1.1 Internal.5 pad.1@134.088,92.63 SCREEN.4 SCREEN.10 SCREEN.11 U1.2 U2.2 U3.2 U5.5 U5.8 U5.12 | length 36.7
  Top Layer w0.2: U1.2@96.625,89.625 96.625,91.198 C15.1@96.66,91.233 v1(96.66,92.376) ; v1(139.93,85.075) U2.2@140.775,85.075 ; U5.5@140.7,105.188 140.7,104.314 140.841,104.173 v1(141.529,104.173) 142.202,104.173 142.47,104.441 142.47,105.022 142.462,105.03 U5.8@142.462,105.45 143.022,105.45 C26.2@143.359,105.113 144.292,105.113 v1(144.357,105.048) ; v1(141.2,86.788) 141.745,87.333 C16.1@141.745,88.947 ; U5.12@141.7,107.212 141.7,107.862 v1(141.835,107.997) ; v3(186.576,92.249) C17.1@186.576,90.852 186.625,90.803 U3.2@186.625,89.625
  Top Layer w0.4: BUZZER1.1@184.45,122.2 184.55,122.1 v4(184.55,120.378) D1.1@184.55,118.919
  Bottom Layer w0.2: v1(116.562,105.584) 116.596,105.55 v1(117.537,105.55) SCREEN.4@119.082,105.55 ; v1(116.562,108.632) 116.779,108.632 116.861,108.55 ; SCREEN.10@119.082,108.55 116.861,108.55 ; SCREEN.11@119.082,109.05 v1(117.361,109.05) 116.861,108.55 ; v1(139.93,85.075) 141.2,86.345 v1(141.2,86.788)
  Bottom Layer w0.4: v1@130.532,96.313 v1(130.543,96.324) v1(130.543,97.26) v1(130.543,98.084) Internal.5@130.543,98.792 C24.2@132.159,98.792 ; C24.2@132.183,98.816 C24.2@132.159,98.792 ; v1(136.247,98.792) v1(135.218,98.792) v1(134.086,98.792) v1(132.991,98.792) C24.2@132.159,98.792
$1N3245: Q1.3 R1.1 | length 3.3
  Bottom Layer w0.2: R1.1@124.554,104.949 124.57,104.933 Q1.3@124.57,101.647
$1N3356: R1.2 SCREEN.3 | length 4
  Bottom Layer w0.2: SCREEN.3@119.082,105.05 122.947,105.05 R1.2@123.048,104.949
$1N3724: D2.2 M1.2 Q2.3 | length 5.4
  Bottom Layer w0.6: M1.2@106.149,124.837 106.411,125.099 D2.2@108.307,125.099 110.389,125.099 Q2.3@111.101,124.387
$1N4002: BUZZER1.2 D1.2 Q3.3 | length 9.1
  Top Layer w0.4: Q3.3@182.863,123.872 186.278,123.872 BUZZER1.2@187.95,122.2 188.02,122.13 D1.2@188.02,118.919
$1N4079: US_M_1.2 US_M_2.1 | length 3.5
  Bottom Layer w0.2: US_M_1.2@139.45,87.45 US_M_2.1@142.95,87.45
$1N4135: US_M_1.4 US_M_2.3 | length 3.5
  Bottom Layer w0.2: US_M_1.4@139.45,82.95 US_M_2.3@142.95,82.95
$1N4921: Q6.3 R10.1 | length 3.4
  Top Layer w0.2: Q6.3@141.724,115.617 145.085,115.617 R10.1@145.137,115.669
$1N4922: Q5.3 R9.1 | length 7.5
  Top Layer w0.2: Q5.3@141.724,120.189 141.724,122.019 141.924,122.219 144.885,122.219 145.266,121.838 145.266,120.262 R9.1@145.466,120.062
$1N4925: Q6.1 R8.2 | length 1.5
  Top Layer w0.2: R8.2@143.411,113.331 143.724,113.644 Q6.1@143.724,114.667
$1N4926: Q5.1 R7.2 | length 1.5
  Top Layer w0.2: R7.2@143.411,117.903 143.724,118.216 Q5.1@143.724,119.239
$1N4930: C9.2 U9.6 | length 1.3
  Top Layer w0.2: C9.2@135.141,122.348 135.5,121.989 U9.6@135.5,121.165
$1N5610: R11.2 U5.1 | length 1.4
  Top Layer w0.2: R11.2@138.66,107.287 139.601,107.287 U5.1@139.938,106.95
$1N6892: R18.1 U6.5 | length 1.6
  Top Layer w0.2: U6.5@126.352,122.663 126.985,122.663 R18.1@127.686,123.364
$1N7163: U1.1 U2.4 | length 50.3
  Top Layer w0.2: U1.1@95.775,89.625 95.423,89.625 94.972,89.174 94.972,87.169 97.385,84.756 138.152,84.756 139.321,85.925 U2.4@140.775,85.925